# EAGLE board LED (EAGLE 9.5.2)
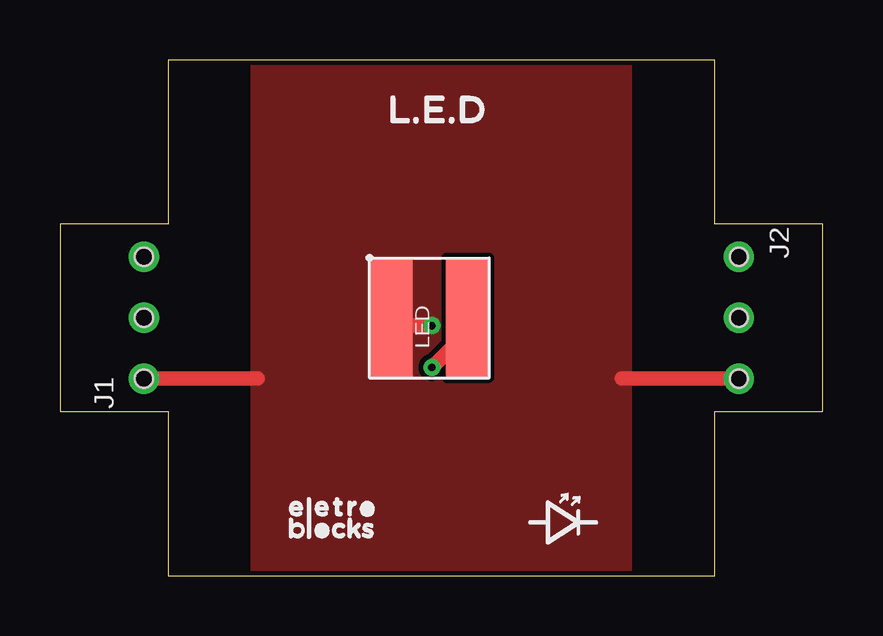
[diagram p0: board, top side]
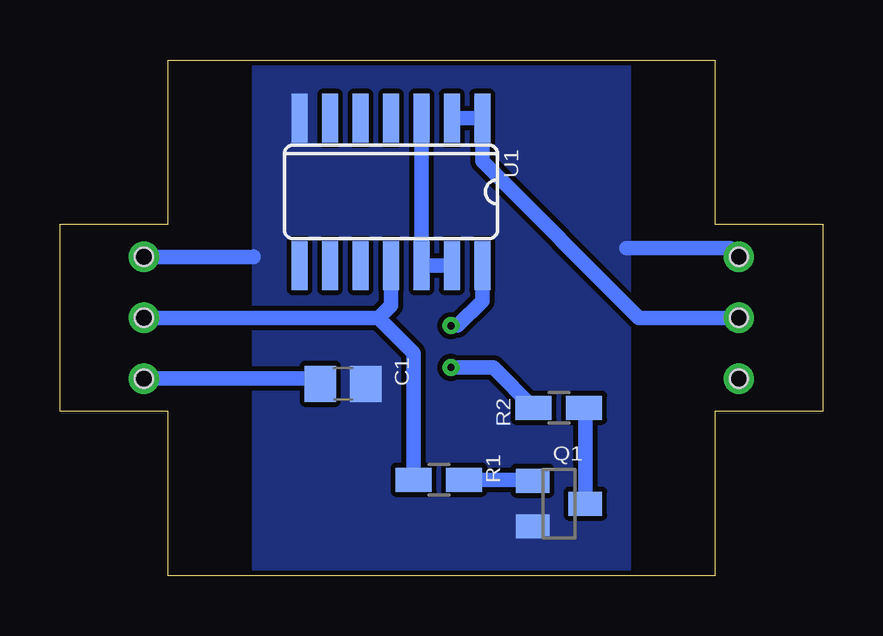
[diagram p1: board, bottom side, seen from below]

Size 31.8 x 21.5 mm. Coordinates in mm from the lower left corner, seen from the top.
Outline: 4.5,0 27.3,0 27.3,6.85 31.8,6.85 31.8,14.65 27.3,14.65 27.3,21.5 4.5,21.5 4.5,14.65 0,14.65 0,6.85 4.5,6.85 4.5,0
Copper layers (1*16): Top 0.035mm / dielectric 1.5mm / Bottom 0.035mm
Design rules "ELETROBLOCKS RULES *": minimum track width 10mil, minimum drill 0.3mm, track to track 8mil, track to pad 8mil, pad to pad 8mil, via to via 8mil, smd to smd 8mil, copper to edge 8mil, drill to drill 8mil, minimum pad ring 10mil, minimum via ring 8mil, stop-mask expansion 4mil, vias tented up to drill 1mm, thermal gap 0mil

## Footprints (pad centres in the part's own frame; a part is rotated, then mirrored left to right if it is on the bottom)
C0805 = smd 1.3 x 1.5: 1 -0.95,0; 2 0.95,0
3CONECTOR = drill 0.75: 1 0,2.54; 2 0,0; 3 0,-2.54 | hole 0.75: 0,2.54; 0,0; 0,-2.54
SOT23 = smd 1 x 1.4: 1 -0.95,-1.1; 2 0.95,-1.1; 3 0,1.1
R0805W = smd 1.5 x 1: 1 -1.052,0; 2 1.052,0
SO14 = smd 0.66 x 2.032: 1 -3.81,-3.073; 2 -2.54,-3.073; 3 -1.27,-3.073; 4 0,-3.073; 5 1.27,-3.073; 6 2.54,-3.073; 7 3.81,-3.073; 8 3.81,3.073; 9 2.54,3.073; 10 1.27,3.073; 11 0,3.073; 12 -1.27,3.073; 13 -2.54,3.073; 14 -3.81,3.073
LED5050 = smd 1.8 x 5: P$1 -1.6,0; P$2 1.6,0

## Placement (x,y rotation side)
C1  100nF  [C0805]  20,8 0 bottom
J1  CONECTOR_MACHO  [3CONECTOR]  3.5,10.75 0 top
J2  CONECTOR_FEMEA  [3CONECTOR]  28.3,10.75 180 top
Q1  BC817  [SOT23]  11,3 270 bottom
R1  1K  [R0805W]  16,4 180 bottom
R2  150R  [R0805W]  11,7 180 bottom
U1  74HC132  [SO14]  18,16 180 bottom
U$1  LED5050  [LED5050]  15.4,10.75 0 top

## Library data of the parts
C1 = rcl; SPICEPREFIX: C
J1 J2 U$1 = Eletroblocks Lib
Q1 = semicon-smd-ipc
R1 R2 = rcl; SPICEPREFIX: R
U1 = 40xx

## Nets
GND: C1.2 J1.1 J2.3 Q1.2 U1.7
LED: R2.2 U$1.P$2
N$2: Q1.1 R1.1
N$3: U1.3 U1.12 U1.13
N$4: Q1.3 R2.1
SIGNAL_IN: J1.2 U1.1 U1.2
SIGNAL_OUT: J2.2 R1.2 U1.11
VCC: C1.1 J1.3 J2.1 U1.14 U$1.P$1

## Tracks (layer width: path | path; a pad name or v marks a point on that pad's centre or on a via)
GND
  Bottom 0.61: J2.3 23.73,13.29 23.72,13.3 | J1.1 3.87,13.65 8.18,13.65
  pour Bottom: 8,0 23.8,0 23.8,21.5 8,21.5
LED  (via drill 0.3)
  Top 0.61: U$1.P$2 17,10.17 v15.5,8.68
  Bottom 0.61: R2.2 13.73,8.68 v15.5,8.68
N$2
  Bottom 0.61: Q1.1 12.15,4 R1.1
N$3
  Bottom 0.61: U1.3 U1.12 U1.13
N$4
  Bottom 0.61: Q1.3 9.9,6.95 R2.1
SIGNAL_IN
  Bottom 0.61: J1.2 7.66,10.75 14.19,17.29 U1.1 U1.2
SIGNAL_OUT
  Bottom 0.61: J2.2 18.52,10.75 | U1.11 18,11.27 18.52,10.75 | R1.2 17.05,9.29 18.52,10.75
VCC  (via drill 0.3)
  Top 0.61: J1.3 8.24,8.21 8.25,8.21 | J2.1 23.44,8.21 23.43,8.21 | v15.5,10.42 14.13,10.42 U$1.P$1
  Bottom 0.61: J2.1 21.16,8.21 C1.1 | U1.14 14.19,11.45 15.22,10.42 v15.5,10.42
  pour Top: 8,0 8,21.37 8.11,21.48 23.72,21.48 23.79,21.41 23.79,0